# EAGLE board Qwiic_FM_Transceiver_Si4721-Panel (EAGLE 9.5.1), part 1 of 2
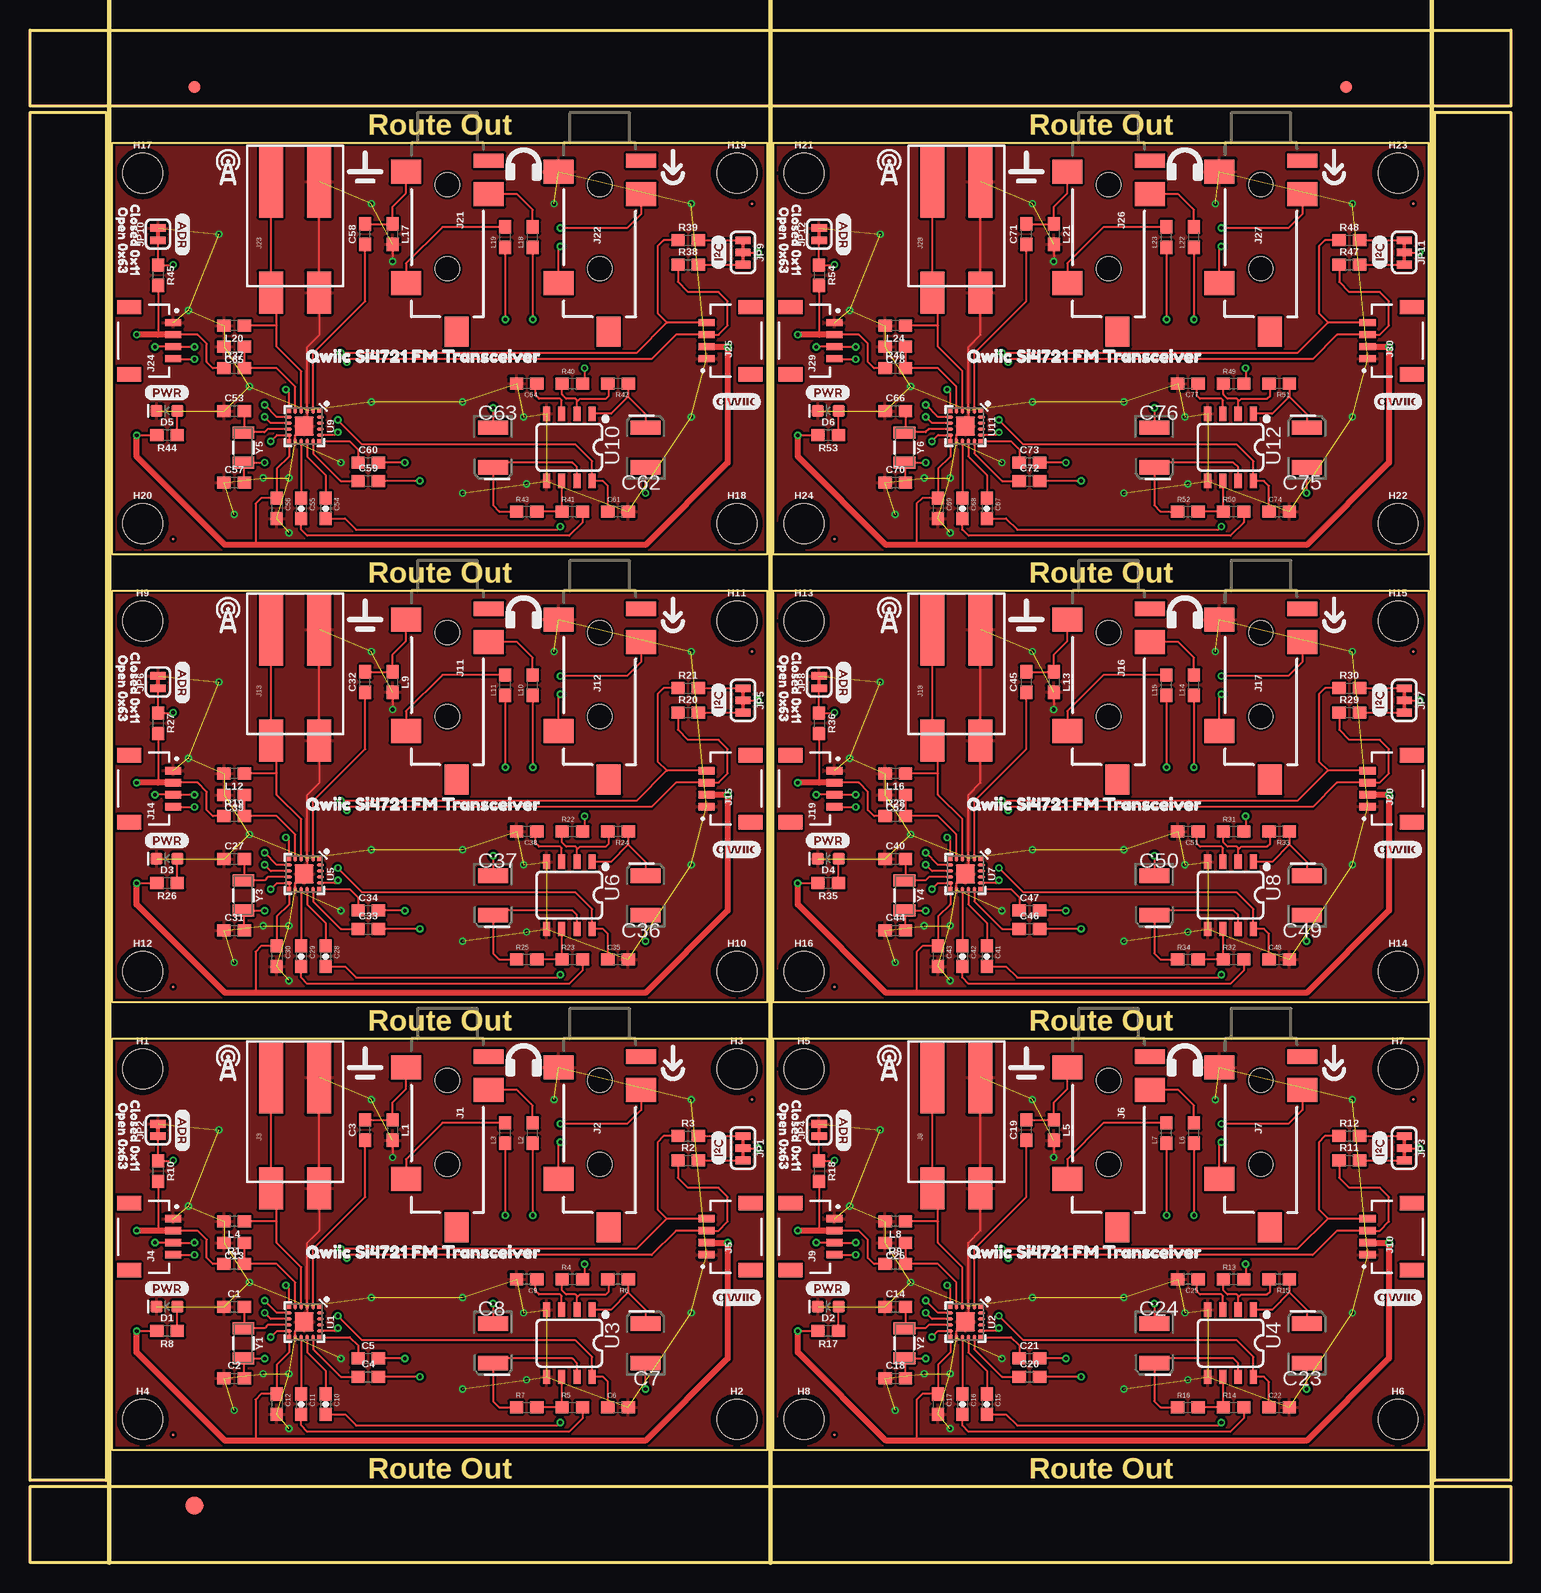
[diagram p0: board, top side]
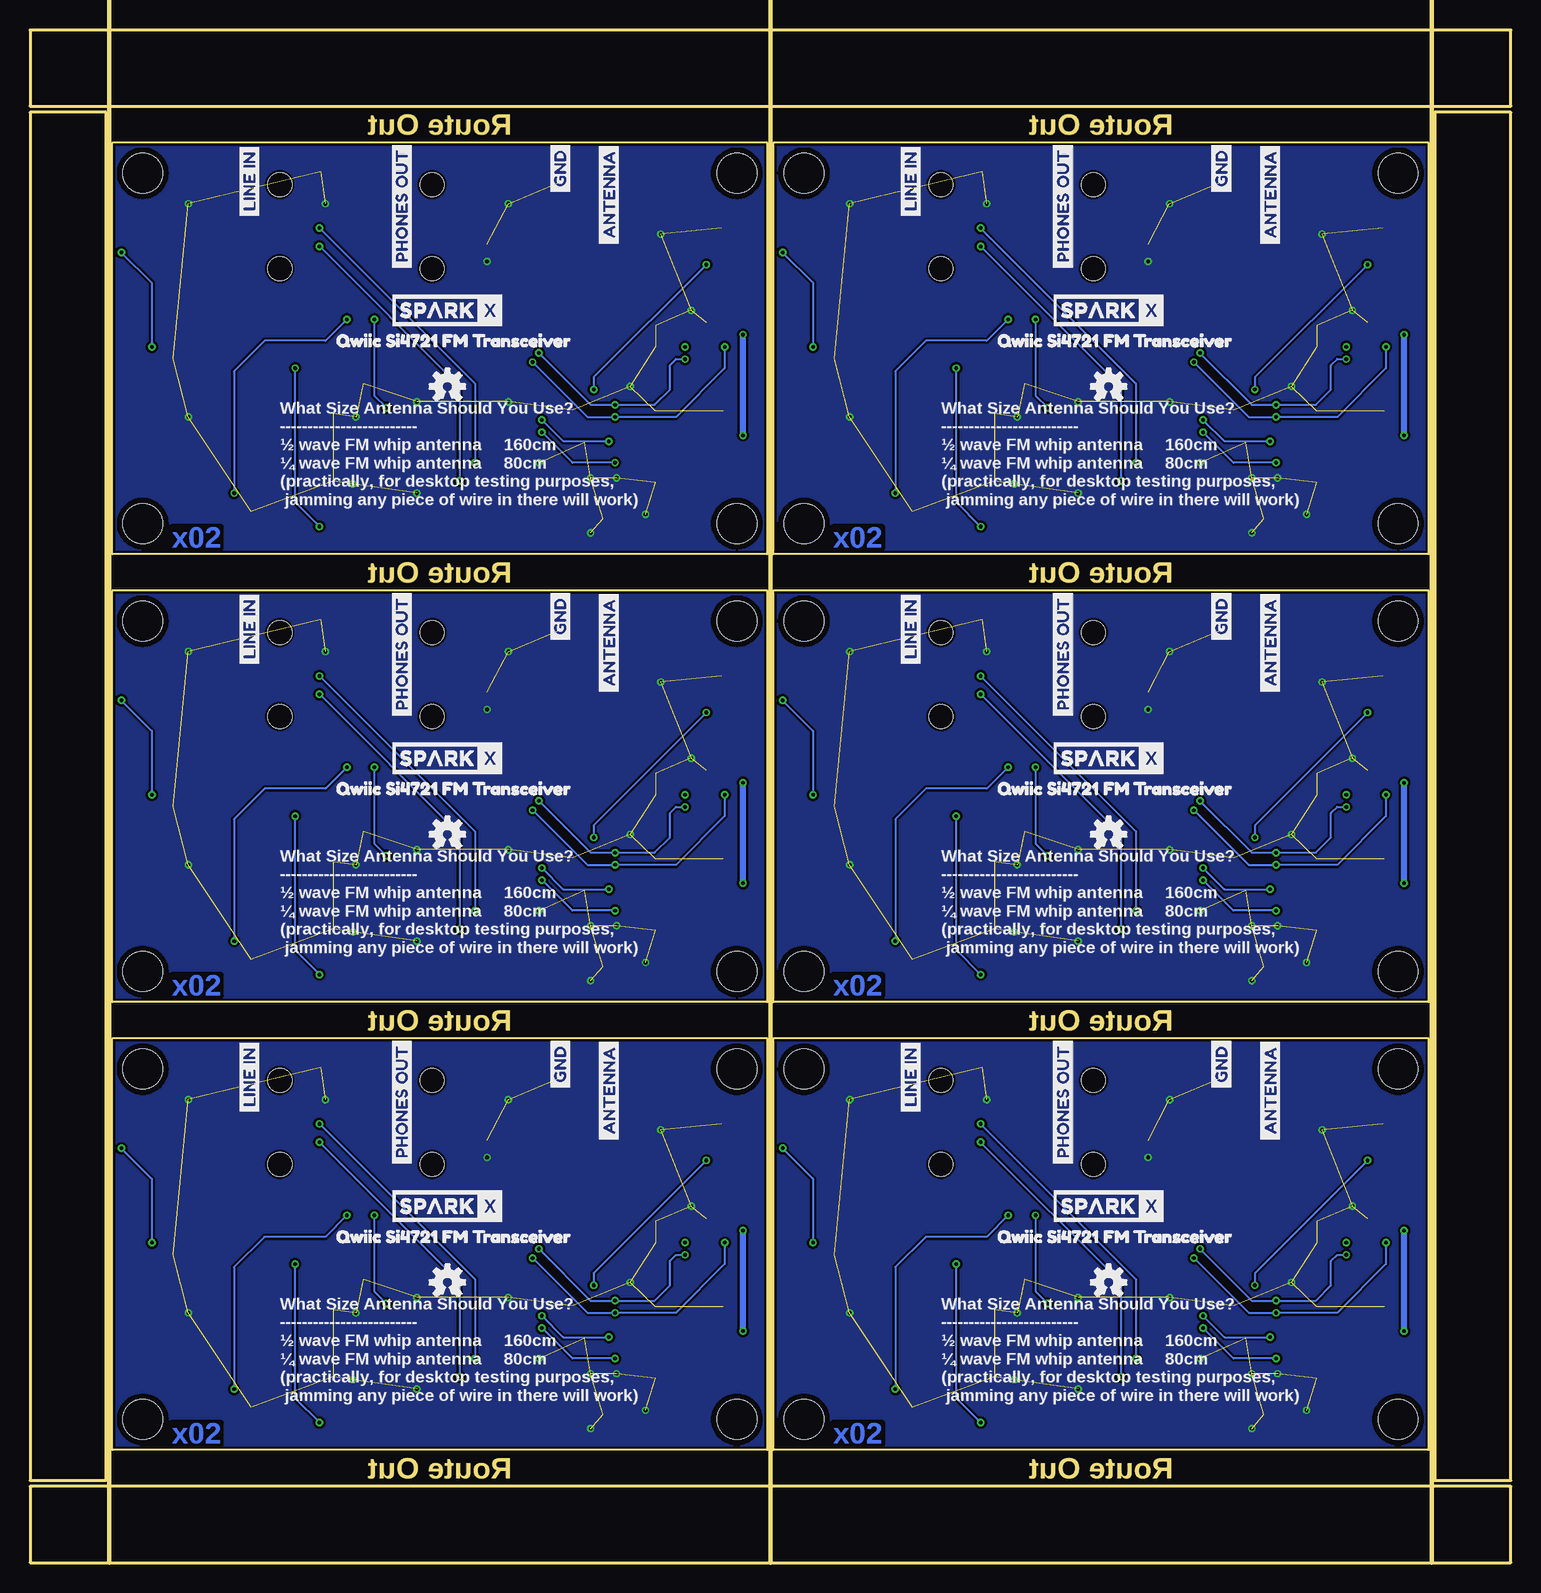
[diagram p1: board, bottom side, seen from below]

Size 123.44 x 127.76 mm. Coordinates in mm from the lower left corner, seen from the top.
Outline: 6.86,9.4 6.86,43.69 61.47,43.69 61.47,9.4 6.86,9.4
Outline: 61.98,9.4 61.98,43.69 116.59,43.69 116.59,9.4 61.98,9.4
Outline: 6.86,46.74 6.86,81.03 61.47,81.03 61.47,46.74 6.86,46.74
Outline: 61.98,46.74 61.98,81.03 116.59,81.03 116.59,46.74 61.98,46.74
Outline: 6.86,84.07 6.86,118.36 61.47,118.36 61.47,84.07 6.86,84.07
Outline: 61.98,84.07 61.98,118.36 116.59,118.36 116.59,84.07 61.98,84.07
Outline: 0,6.35 123.44,6.35 123.44,0 0,0 0,6.35
Outline: 117.09,120.9 123.44,120.9 123.44,6.86 117.09,6.86 117.09,120.9
Outline: 0,127.76 123.44,127.76 123.44,121.41 0,121.41 0,127.76
Outline: 0,120.9 6.35,120.9 6.35,6.86 0,6.86 0,120.9
Copper layers (1*16): Top 0.035mm / dielectric 1.5mm / Bottom 0.035mm
Design rules "SparkFun-2-layer-PCBWay-LIMIT": minimum track width 6mil, minimum drill 0.3mm, track to track 6mil, track to pad 6mil, pad to pad 6mil, via to via 6mil, smd to smd 6mil, copper to edge 6mil, drill to drill 6mil, minimum pad ring 6mil, minimum via ring 6mil, stop-mask expansion 4mil, vias tented up to drill 25mil, thermal gap 10mil
Milling: 3 lines

## Footprints (pad centres in the part's own frame; a part is rotated, then mirrored left to right if it is on the bottom)
0603 = smd 1.1 x 1: 1 -0.85,0; 2 0.85,0
EIA3528 = smd 1.2 x 2.5: A 1.65,0; C -1.65,0
0603-CAP = smd 1.1 x 1: 1 -0.85,0; 2 0.85,0
LED-0603 = smd 1 x 1: A -0.877,0; C 0.877,0
FIDUCIAL-1X2 = smd 1 x 1: 1 0,0
FIDUCIAL-1.5X3 = smd 1.5 x 1.5: 1 0,0
FIDUCIAL-0.2MM = smd 0.2 x 0.2: 1 0,0
STAND-OFF = hole 3.302: 0,0
AUDIO-JACK-3.5MM-SMD = smd 2 x 2.5: RING 4.3,3.45; SLEEVE 2.4,-3.45; TIP 11.7,-3.45 | smd 1.2 x 2.5: RSH 1.5,3.45 | smd 2.5 x 2: TSH 15.75,0.75 | hole 2: 3.5,0; 10.5,0
1X02_POKEHOME = smd 3.5 x 2: P1 5.25,2; P2 5.25,-2 | smd 6 x 2: P3 -4,2; P4 -4,-2
JST04_1MM_RA = smd 0.6 x 1.35: 1 -1.5,0; 2 -0.5,0; 3 0.5,0; 4 1.5,0 | smd 1.2 x 2: NC1 2.8,-3.675; NC2 -2.8,-3.675
SMT-JUMPER_3_2-NC_TRACE_SILK = smd 0.635 x 1.27: 1 -1.016,0; 2 0,0; 3 1.016,0
SMT-JUMPER_2_NC_TRACE_SILK = smd 0.635 x 1.27: 1 -0.508,0; 2 0.508,0
QFN-20-3X3MM = smd 0.34 x 0.34: 1 -1.275,1.265; 6 -1.265,-1.265; 11 1.265,-1.265; 16 1.265,1.265 | smd 0.61 x 0.28: 2 -1.335,0.75; 3 -1.335,0.25; 4 -1.335,-0.25; 5 -1.335,-0.75; 12 1.335,-0.75; 13 1.335,-0.25; 14 1.335,0.25; 15 1.335,0.75 | smd 0.28 x 0.61: 7 -0.75,-1.335; 8 -0.25,-1.335; 9 0.25,-1.335; 10 0.75,-1.335; 17 0.75,1.335; 18 0.25,1.335; 19 -0.25,1.335; 20 -0.75,1.335 | smd 1.6 x 1.6: 21 0,0
SO08 = smd 0.6 x 1.2: 1 -1.905,-2.8; 2 -0.635,-2.8; 3 0.635,-2.8; 4 1.905,-2.8; 5 1.905,2.8; 6 0.635,2.8; 7 -0.635,2.8; 8 -1.905,2.8
CRYSTAL-SMD-3.2X1.5MM = smd 1 x 1.8: P$1 -1.25,0; P$2 1.25,0

## Placement (x,y rotation side)
C1  15pF  [0603]  17.02,21.34 0 top
C2  15pF  [0603]  17.02,15.37 0 top
C3  1nF  [0603]  27.94,36.07 90 top
C4  0.47uF  [0603]  28.19,15.49 0 top
C5  0.47uF  [0603]  28.19,17.02 0 top
C6  0.1uF  [0603]  49.02,12.95 0 top
C7  47uF  [EIA3528]  51.31,18.29 90 top
C8  47uF  [EIA3528]  38.61,18.29 270 top
C9  0.1uF  [0603]  41.4,23.62 180 top
C10  1uF  [0603-CAP]  24.64,13.21 270 top
C11  1uF  [0603-CAP]  22.61,13.21 270 top
C12  22nF  [0603]  20.57,13.21 270 top
C13  2.2uF  [0603]  17.02,26.67 180 top
C14  15pF  [0603]  72.14,21.34 0 top
C15  1uF  [0603-CAP]  79.76,13.21 270 top
C16  1uF  [0603-CAP]  77.72,13.21 270 top
C17  22nF  [0603]  75.69,13.21 270 top
C18  15pF  [0603]  72.14,15.37 0 top
C19  1nF  [0603]  83.06,36.07 90 top
C20  0.47uF  [0603]  83.31,15.49 0 top
C21  0.47uF  [0603]  83.31,17.02 0 top
C22  0.1uF  [0603]  104.14,12.95 0 top
C23  47uF  [EIA3528]  106.43,18.29 90 top
C24  47uF  [EIA3528]  93.73,18.29 270 top
C25  0.1uF  [0603]  96.52,23.62 180 top
C26  2.2uF  [0603]  72.14,26.67 180 top
C27  15pF  [0603]  17.02,58.67 0 top
C28  1uF  [0603-CAP]  24.64,50.55 270 top
C29  1uF  [0603-CAP]  22.61,50.55 270 top
C30  22nF  [0603]  20.57,50.55 270 top
C31  15pF  [0603]  17.02,52.7 0 top
C32  1nF  [0603]  27.94,73.41 90 top
C33  0.47uF  [0603]  28.19,52.83 0 top
C34  0.47uF  [0603]  28.19,54.36 0 top
C35  0.1uF  [0603]  49.02,50.29 0 top
C36  47uF  [EIA3528]  51.31,55.63 90 top
C37  47uF  [EIA3528]  38.61,55.63 270 top
C38  0.1uF  [0603]  41.4,60.96 180 top
C39  2.2uF  [0603]  17.02,64.01 180 top
C40  15pF  [0603]  72.14,58.67 0 top
C41  1uF  [0603-CAP]  79.76,50.55 270 top
C42  1uF  [0603-CAP]  77.72,50.55 270 top
C43  22nF  [0603]  75.69,50.55 270 top
C44  15pF  [0603]  72.14,52.7 0 top
C45  1nF  [0603]  83.06,73.41 90 top
C46  0.47uF  [0603]  83.31,52.83 0 top
C47  0.47uF  [0603]  83.31,54.36 0 top
C48  0.1uF  [0603]  104.14,50.29 0 top
C49  47uF  [EIA3528]  106.43,55.63 90 top
C50  47uF  [EIA3528]  93.73,55.63 270 top
C51  0.1uF  [0603]  96.52,60.96 180 top
C52  2.2uF  [0603]  72.14,64.01 180 top
C53  15pF  [0603]  17.02,96.01 0 top
C54  1uF  [0603-CAP]  24.64,87.88 270 top
C55  1uF  [0603-CAP]  22.61,87.88 270 top
C56  22nF  [0603]  20.57,87.88 270 top
C57  15pF  [0603]  17.02,90.04 0 top
C58  1nF  [0603]  27.94,110.74 90 top
C59  0.47uF  [0603]  28.19,90.17 0 top
C60  0.47uF  [0603]  28.19,91.69 0 top
C61  0.1uF  [0603]  49.02,87.63 0 top
C62  47uF  [EIA3528]  51.31,92.96 90 top
C63  47uF  [EIA3528]  38.61,92.96 270 top
C64  0.1uF  [0603]  41.4,98.3 180 top
C65  2.2uF  [0603]  17.02,101.35 180 top
C66  15pF  [0603]  72.14,96.01 0 top
C67  1uF  [0603-CAP]  79.76,87.88 270 top
C68  1uF  [0603-CAP]  77.72,87.88 270 top
C69  22nF  [0603]  75.69,87.88 270 top
C70  15pF  [0603]  72.14,90.04 0 top
C71  1nF  [0603]  83.06,110.74 90 top
C72  0.47uF  [0603]  83.31,90.17 0 top
C73  0.47uF  [0603]  83.31,91.69 0 top
C74  0.1uF  [0603]  104.14,87.63 0 top
C75  47uF  [EIA3528]  106.43,92.96 90 top
C76  47uF  [EIA3528]  93.73,92.96 270 top
C77  0.1uF  [0603]  96.52,98.3 180 top
C78  2.2uF  [0603]  72.14,101.35 180 top
D1  RED  [LED-0603]  11.43,21.34 180 top
D2  RED  [LED-0603]  66.55,21.34 180 top
D3  RED  [LED-0603]  11.43,58.67 180 top
D4  RED  [LED-0603]  66.55,58.67 180 top
D5  RED  [LED-0603]  11.43,96.01 180 top
D6  RED  [LED-0603]  66.55,96.01 180 top
E$1  [FIDUCIAL-1X2]  13.72,123 0 top
E$2  [FIDUCIAL-1X2]  109.73,123 0 top
E$3  [FIDUCIAL-1.5X3]  13.72,4.76 0 top
FD1  FIDUCIAL0.2MM  [FIDUCIAL-0.2MM]  60.2,38.61 0 top
FD2  FIDUCIAL0.2MM  [FIDUCIAL-0.2MM]  11.94,10.67 0 top
FD3  FIDUCIAL0.2MM  [FIDUCIAL-0.2MM]  115.32,38.61 0 top
FD4  FIDUCIAL0.2MM  [FIDUCIAL-0.2MM]  67.06,10.67 0 top
FD5  FIDUCIAL0.2MM  [FIDUCIAL-0.2MM]  60.2,75.95 0 top
FD6  FIDUCIAL0.2MM  [FIDUCIAL-0.2MM]  11.94,48.01 0 top
FD7  FIDUCIAL0.2MM  [FIDUCIAL-0.2MM]  115.32,75.95 0 top
FD8  FIDUCIAL0.2MM  [FIDUCIAL-0.2MM]  67.06,48.01 0 top
FD9  FIDUCIAL0.2MM  [FIDUCIAL-0.2MM]  60.2,113.28 0 top
FD10  FIDUCIAL0.2MM  [FIDUCIAL-0.2MM]  11.94,85.34 0 top
FD11  FIDUCIAL0.2MM  [FIDUCIAL-0.2MM]  115.32,113.28 0 top
FD12  FIDUCIAL0.2MM  [FIDUCIAL-0.2MM]  67.06,85.34 0 top
H1  STAND-OFF  [STAND-OFF]  9.4,41.15 0 top
H2  STAND-OFF  [STAND-OFF]  58.93,11.94 0 top
H3  STAND-OFF  [STAND-OFF]  58.93,41.15 0 top
H4  STAND-OFF  [STAND-OFF]  9.4,11.94 0 top
H5  STAND-OFF  [STAND-OFF]  64.52,41.15 0 top
H6  STAND-OFF  [STAND-OFF]  114.05,11.94 0 top
H7  STAND-OFF  [STAND-OFF]  114.05,41.15 0 top
H8  STAND-OFF  [STAND-OFF]  64.52,11.94 0 top
H9  STAND-OFF  [STAND-OFF]  9.4,78.49 0 top
H10  STAND-OFF  [STAND-OFF]  58.93,49.28 0 top
H11  STAND-OFF  [STAND-OFF]  58.93,78.49 0 top
H12  STAND-OFF  [STAND-OFF]  9.4,49.28 0 top
H13  STAND-OFF  [STAND-OFF]  64.52,78.49 0 top
H14  STAND-OFF  [STAND-OFF]  114.05,49.28 0 top
H15  STAND-OFF  [STAND-OFF]  114.05,78.49 0 top
H16  STAND-OFF  [STAND-OFF]  64.52,49.28 0 top
H17  STAND-OFF  [STAND-OFF]  9.4,115.82 0 top
H18  STAND-OFF  [STAND-OFF]  58.93,86.61 0 top
H19  STAND-OFF  [STAND-OFF]  58.93,115.82 0 top
H20  STAND-OFF  [STAND-OFF]  9.4,86.61 0 top
H21  STAND-OFF  [STAND-OFF]  64.52,115.82 0 top
H22  STAND-OFF  [STAND-OFF]  114.05,86.61 0 top
H23  STAND-OFF  [STAND-OFF]  114.05,115.82 0 top
H24  STAND-OFF  [STAND-OFF]  64.52,86.61 0 top
J1  AUDIO_JACK_3.5MM_SMD  [AUDIO-JACK-3.5MM-SMD]  34.8,43.69 270 top
J2  AUDIO_JACK_3.5MM_SMD  [AUDIO-JACK-3.5MM-SMD]  47.5,43.69 270 top
J3  [1X02_POKEHOME]  22.1,36.45 270 top
J4  QWIIC_RIGHT_ANGLE  [JST04_1MM_RA]  11.94,27.18 270 top
J5  QWIIC_RIGHT_ANGLE  [JST04_1MM_RA]  56.39,27.18 90 top
J6  AUDIO_JACK_3.5MM_SMD  [AUDIO-JACK-3.5MM-SMD]  89.92,43.69 270 top
J7  AUDIO_JACK_3.5MM_SMD  [AUDIO-JACK-3.5MM-SMD]  102.62,43.69 270 top
J8  [1X02_POKEHOME]  77.22,36.45 270 top
J9  QWIIC_RIGHT_ANGLE  [JST04_1MM_RA]  67.06,27.18 270 top
J10  QWIIC_RIGHT_ANGLE  [JST04_1MM_RA]  111.51,27.18 90 top
J11  AUDIO_JACK_3.5MM_SMD  [AUDIO-JACK-3.5MM-SMD]  34.8,81.03 270 top
J12  AUDIO_JACK_3.5MM_SMD  [AUDIO-JACK-3.5MM-SMD]  47.5,81.03 270 top
J13  [1X02_POKEHOME]  22.1,73.79 270 top
J14  QWIIC_RIGHT_ANGLE  [JST04_1MM_RA]  11.94,64.52 270 top
J15  QWIIC_RIGHT_ANGLE  [JST04_1MM_RA]  56.39,64.52 90 top
J16  AUDIO_JACK_3.5MM_SMD  [AUDIO-JACK-3.5MM-SMD]  89.92,81.03 270 top
J17  AUDIO_JACK_3.5MM_SMD  [AUDIO-JACK-3.5MM-SMD]  102.62,81.03 270 top
J18  [1X02_POKEHOME]  77.22,73.79 270 top
J19  QWIIC_RIGHT_ANGLE  [JST04_1MM_RA]  67.06,64.52 270 top
J20  QWIIC_RIGHT_ANGLE  [JST04_1MM_RA]  111.51,64.52 90 top
J21  AUDIO_JACK_3.5MM_SMD  [AUDIO-JACK-3.5MM-SMD]  34.8,118.36 270 top
J22  AUDIO_JACK_3.5MM_SMD  [AUDIO-JACK-3.5MM-SMD]  47.5,118.36 270 top
J23  [1X02_POKEHOME]  22.1,111.12 270 top
J24  QWIIC_RIGHT_ANGLE  [JST04_1MM_RA]  11.94,101.85 270 top
J25  QWIIC_RIGHT_ANGLE  [JST04_1MM_RA]  56.39,101.85 90 top
J26  AUDIO_JACK_3.5MM_SMD  [AUDIO-JACK-3.5MM-SMD]  89.92,118.36 270 top
J27  AUDIO_JACK_3.5MM_SMD  [AUDIO-JACK-3.5MM-SMD]  102.62,118.36 270 top
J28  [1X02_POKEHOME]  77.22,111.12 270 top
J29  QWIIC_RIGHT_ANGLE  [JST04_1MM_RA]  67.06,101.85 270 top
J30  QWIIC_RIGHT_ANGLE  [JST04_1MM_RA]  111.51,101.85 90 top
JP1  JUMPER-SMT_3_2-NC_TRACE_SILK  [SMT-JUMPER_3_2-NC_TRACE_SILK]  59.44,34.54 270 top
JP2  [SMT-JUMPER_2_NC_TRACE_SILK]  10.67,36.07 90 top
JP3  JUMPER-SMT_3_2-NC_TRACE_SILK  [SMT-JUMPER_3_2-NC_TRACE_SILK]  114.55,34.54 270 top
JP4  [SMT-JUMPER_2_NC_TRACE_SILK]  65.79,36.07 90 top
JP5  JUMPER-SMT_3_2-NC_TRACE_SILK  [SMT-JUMPER_3_2-NC_TRACE_SILK]  59.44,71.88 270 top
JP6  [SMT-JUMPER_2_NC_TRACE_SILK]  10.67,73.41 90 top
JP7  JUMPER-SMT_3_2-NC_TRACE_SILK  [SMT-JUMPER_3_2-NC_TRACE_SILK]  114.55,71.88 270 top
JP8  [SMT-JUMPER_2_NC_TRACE_SILK]  65.79,73.41 90 top
JP9  JUMPER-SMT_3_2-NC_TRACE_SILK  [SMT-JUMPER_3_2-NC_TRACE_SILK]  59.44,109.22 270 top
JP10  [SMT-JUMPER_2_NC_TRACE_SILK]  10.67,110.74 90 top
JP11  JUMPER-SMT_3_2-NC_TRACE_SILK  [SMT-JUMPER_3_2-NC_TRACE_SILK]  114.55,109.22 270 top
JP12  [SMT-JUMPER_2_NC_TRACE_SILK]  65.79,110.74 90 top
L1  270nH  [0603]  30.23,36.07 270 top
L2  FERITE 2.5k  [0603]  41.91,35.81 90 top
L3  FERITE 2.5K  [0603]  39.62,35.81 90 top
L4  120nH  [0603]  17.02,28.45 180 top
L5  270nH  [0603]  85.34,36.07 270 top
L6  FERITE 2.5k  [0603]  97.03,35.81 90 top
L7  FERITE 2.5K  [0603]  94.74,35.81 90 top
L8  120nH  [0603]  72.14,28.45 180 top
L9  270nH  [0603]  30.23,73.41 270 top
L10  FERITE 2.5k  [0603]  41.91,73.15 90 top
L11  FERITE 2.5K  [0603]  39.62,73.15 90 top
L12  120nH  [0603]  17.02,65.79 180 top
L13  270nH  [0603]  85.34,73.41 270 top
L14  FERITE 2.5k  [0603]  97.03,73.15 90 top
L15  FERITE 2.5K  [0603]  94.74,73.15 90 top
L16  120nH  [0603]  72.14,65.79 180 top
L17  270nH  [0603]  30.23,110.74 270 top
L18  FERITE 2.5k  [0603]  41.91,110.49 90 top
L19  FERITE 2.5K  [0603]  39.62,110.49 90 top
L20  120nH  [0603]  17.02,103.12 180 top
L21  270nH  [0603]  85.34,110.74 270 top
L22  FERITE 2.5k  [0603]  97.03,110.49 90 top
L23  FERITE 2.5K  [0603]  94.74,110.49 90 top
L24  120nH  [0603]  72.14,103.12 180 top
R1  10k  [0603]  17.02,24.89 0 top
R2  2.2k  [0603]  54.86,33.53 0 top
R3  2.2k  [0603]  54.86,35.56 0 top
R4  20k  [0603]  45.21,23.62 0 top
R5  20k  [0603]  45.21,12.95 0 top
R6  20k  [0603]  49.02,23.62 180 top
R7  20k  [0603]  41.4,12.95 0 top
R8  1k  [0603]  11.43,19.3 180 top
R9  10k  [0603]  72.14,24.89 0 top
R10  100k  [0603]  10.67,32.64 270 top
R11  2.2k  [0603]  109.98,33.53 0 top
R12  2.2k  [0603]  109.98,35.56 0 top
R13  20k  [0603]  100.33,23.62 0 top
R14  20k  [0603]  100.33,12.95 0 top
R15  20k  [0603]  104.14,23.62 180 top
R16  20k  [0603]  96.52,12.95 0 top
R17  1k  [0603]  66.55,19.3 180 top
R18  100k  [0603]  65.79,32.64 270 top
R19  10k  [0603]  17.02,62.23 0 top
R20  2.2k  [0603]  54.86,70.87 0 top
R21  2.2k  [0603]  54.86,72.9 0 top
R22  20k  [0603]  45.21,60.96 0 top
R23  20k  [0603]  45.21,50.29 0 top
R24  20k  [0603]  49.02,60.96 180 top
R25  20k  [0603]  41.4,50.29 0 top
R26  1k  [0603]  11.43,56.64 180 top
R27  100k  [0603]  10.67,69.98 270 top
R28  10k  [0603]  72.14,62.23 0 top
R29  2.2k  [0603]  109.98,70.87 0 top
R30  2.2k  [0603]  109.98,72.9 0 top
R31  20k  [0603]  100.33,60.96 0 top
R32  20k  [0603]  100.33,50.29 0 top
R33  20k  [0603]  104.14,60.96 180 top
R34  20k  [0603]  96.52,50.29 0 top
R35  1k  [0603]  66.55,56.64 180 top
R36  100k  [0603]  65.79,69.98 270 top
R37  10k  [0603]  17.02,99.57 0 top
R38  2.2k  [0603]  54.86,108.2 0 top
R39  2.2k  [0603]  54.86,110.24 0 top
R40  20k  [0603]  45.21,98.3 0 top
R41  20k  [0603]  45.21,87.63 0 top
R42  20k  [0603]  49.02,98.3 180 top
R43  20k  [0603]  41.4,87.63 0 top
R44  1k  [0603]  11.43,93.98 180 top
R45  100k  [0603]  10.67,107.31 270 top
R46  10k  [0603]  72.14,99.57 0 top
R47  2.2k  [0603]  109.98,108.2 0 top
R48  2.2k  [0603]  109.98,110.24 0 top
R49  20k  [0603]  100.33,98.3 0 top
R50  20k  [0603]  100.33,87.63 0 top
R51  20k  [0603]  104.14,98.3 180 top
R52  20k  [0603]  96.52,87.63 0 top
R53  1k  [0603]  66.55,93.98 180 top
R54  100k  [0603]  65.79,107.31 270 top
U1  SI4721  [QFN-20-3X3MM]  22.86,20.07 270 top
U2  SI4721  [QFN-20-3X3MM]  77.98,20.07 270 top
U3  TPA6111A2DR  [SO08]  44.96,18.29 180 top
U4  TPA6111A2DR  [SO08]  100.08,18.29 180 top
U5  SI4721  [QFN-20-3X3MM]  22.86,57.4 270 top
U6  TPA6111A2DR  [SO08]  44.96,55.63 180 top
U7  SI4721  [QFN-20-3X3MM]  77.98,57.4 270 top
U8  TPA6111A2DR  [SO08]  100.08,55.63 180 top
U9  SI4721  [QFN-20-3X3MM]  22.86,94.74 270 top
U10  TPA6111A2DR  [SO08]  44.96,92.96 180 top
U11  SI4721  [QFN-20-3X3MM]  77.98,94.74 270 top
U12  TPA6111A2DR  [SO08]  100.08,92.96 180 top
U$1  [QWIIC_SI4721_FM_TRANSCEIVER0]  22.1,25.91 0 top
U$2  [QWIIC_SI4721_FM_TRANSCEIVER0]  43.69,27.18 0 bottom
U$3  [QWIIC_4MM]  58.93,22.1 0 top
U$4  [ANTENNA1]  20.07,34.8 90 bottom
U$5  [PWR-()-03]  9.52,22.86 0 top
U$6  [OSHW-LOGO-S]  33.53,23.37 0 bottom
U$7  [GND0]  24.13,39.12 90 bottom
U$8  [LINE_IN2]  50.04,37.08 90 bottom
U$9  [PHONES_OUT3]  37.34,32.77 90 bottom
U$10  [PHONES#PNG]  41.15,41.91 0 top
U$11  [IN#PNG]  53.59,41.66 0 top
U$12  [GND#PNG]  27.94,41.66 0 top
U$13  [ANTENNA#PNG]  16.51,41.66 0 top
U$14  [I_SUPER2_C-()-03]  57.4,33.15 90 top
U$15  [CLOSED_0X110]  8.76,39.24 270 top
U$16  [ADR-()-03]  12.7,37.85 270 top
U$17  [OPEN_0X631]  7.75,38.99 270 top
U$18  SPARKX-LOGO4  [SPARKX-MEDIUM]  33.53,29.72 0 bottom
U$19  [QWIIC_SI4721_FM_TRANSCEIVER0]  98.81,27.18 0 bottom
U$20  [QWIIC_4MM]  114.05,22.1 0 top
U$21  [OSHW-LOGO-S]  88.65,23.37 0 bottom
U$22  [ANTENNA1]  75.18,34.8 90 bottom
U$23  [GND0]  79.25,39.12 90 bottom
U$24  [LINE_IN2]  105.16,37.08 90 bottom
U$25  [PHONES_OUT3]  92.46,32.77 90 bottom
U$26  [PHONES#PNG]  96.27,41.91 0 top
U$27  [IN#PNG]  108.71,41.66 0 top
U$28  [GND#PNG]  83.06,41.66 0 top
U$29  [ANTENNA#PNG]  71.63,41.66 0 top
U$30  SPARKX-LOGO4  [SPARKX-MEDIUM]  88.65,29.72 0 bottom
U$31  [QWIIC_SI4721_FM_TRANSCEIVER0]  77.22,25.91 0 top
U$32  [PWR-()-03]  64.64,22.86 0 top
U$33  [I_SUPER2_C-()-03]  112.52,33.15 90 top
U$34  [ADR-()-03]  67.82,37.85 270 top
U$35  [CLOSED_0X110]  63.88,39.24 270 top
U$36  [OPEN_0X631]  62.86,38.99 270 top
U$37  [QWIIC_SI4721_FM_TRANSCEIVER0]  43.69,64.52 0 bottom
U$38  [QWIIC_4MM]  58.93,59.44 0 top
U$39  [OSHW-LOGO-S]  33.53,60.71 0 bottom
U$40  [ANTENNA1]  20.07,72.14 90 bottom
U$41  [GND0]  24.13,76.45 90 bottom
U$42  [LINE_IN2]  50.04,74.42 90 bottom
U$43  [PHONES_OUT3]  37.34,70.1 90 bottom
U$44  [PHONES#PNG]  41.15,79.25 0 top
U$45  [IN#PNG]  53.59,78.99 0 top
U$46  [GND#PNG]  27.94,78.99 0 top
U$47  [ANTENNA#PNG]  16.51,78.99 0 top
U$48  SPARKX-LOGO4  [SPARKX-MEDIUM]  33.53,67.06 0 bottom
U$49  [QWIIC_SI4721_FM_TRANSCEIVER0]  22.1,63.25 0 top
U$50  [PWR-()-03]  9.52,60.2 0 top
U$51  [I_SUPER2_C-()-03]  57.4,70.48 90 top
U$52  [ADR-()-03]  12.7,75.18 270 top
U$53  [CLOSED_0X110]  8.76,76.58 270 top
U$54  [OPEN_0X631]  7.75,76.33 270 top
U$55  [QWIIC_SI4721_FM_TRANSCEIVER0]  98.81,64.52 0 bottom
U$56  [QWIIC_4MM]  114.05,59.44 0 top
U$57  [OSHW-LOGO-S]  88.65,60.71 0 bottom
U$58  [ANTENNA1]  75.18,72.14 90 bottom
U$59  [GND0]  79.25,76.45 90 bottom
U$60  [LINE_IN2]  105.16,74.42 90 bottom
U$61  [PHONES_OUT3]  92.46,70.1 90 bottom
U$62  [PHONES#PNG]  96.27,79.25 0 top
U$63  [IN#PNG]  108.71,78.99 0 top
U$64  [GND#PNG]  83.06,78.99 0 top
U$65  [ANTENNA#PNG]  71.63,78.99 0 top
U$66  SPARKX-LOGO4  [SPARKX-MEDIUM]  88.65,67.06 0 bottom
U$67  [QWIIC_SI4721_FM_TRANSCEIVER0]  77.22,63.25 0 top
U$68  [PWR-()-03]  64.64,60.2 0 top
U$69  [I_SUPER2_C-()-03]  112.52,70.48 90 top
U$70  [ADR-()-03]  67.82,75.18 270 top
U$71  [CLOSED_0X110]  63.88,76.58 270 top
U$72  [OPEN_0X631]  62.86,76.33 270 top
U$73  [QWIIC_SI4721_FM_TRANSCEIVER0]  43.69,101.85 0 bottom
U$74  [QWIIC_4MM]  58.93,96.77 0 top
U$75  [OSHW-LOGO-S]  33.53,98.04 0 bottom
U$76  [ANTENNA1]  20.07,109.47 90 bottom
U$77  [GND0]  24.13,113.79 90 bottom
U$78  [LINE_IN2]  50.04,111.76 90 bottom
U$79  [PHONES_OUT3]  37.34,107.44 90 bottom
U$80  [PHONES#PNG]  41.15,116.59 0 top
U$81  [IN#PNG]  53.59,116.33 0 top
U$82  [GND#PNG]  27.94,116.33 0 top
U$83  [ANTENNA#PNG]  16.51,116.33 0 top
U$84  SPARKX-LOGO4  [SPARKX-MEDIUM]  33.53,104.39 0 bottom
U$85  [QWIIC_SI4721_FM_TRANSCEIVER0]  22.1,100.58 0 top
U$86  [PWR-()-03]  9.52,97.54 0 top
U$87  [I_SUPER2_C-()-03]  57.4,107.82 90 top
U$88  [ADR-()-03]  12.7,112.52 270 top
U$89  [CLOSED_0X110]  8.76,113.92 270 top
U$90  [OPEN_0X631]  7.75,113.66 270 top
U$91  [QWIIC_SI4721_FM_TRANSCEIVER0]  98.81,101.85 0 bottom
U$92  [QWIIC_4MM]  114.05,96.77 0 top
U$93  [OSHW-LOGO-S]  88.65,98.04 0 bottom
U$94  [ANTENNA1]  75.18,109.47 90 bottom
U$95  [GND0]  79.25,113.79 90 bottom
U$96  [LINE_IN2]  105.16,111.76 90 bottom
U$97  [PHONES_OUT3]  92.46,107.44 90 bottom
U$98  [PHONES#PNG]  96.27,116.59 0 top
U$99  [IN#PNG]  108.71,116.33 0 top
U$100  [GND#PNG]  83.06,116.33 0 top
U$101  [ANTENNA#PNG]  71.63,116.33 0 top
U$102  SPARKX-LOGO4  [SPARKX-MEDIUM]  88.65,104.39 0 bottom
U$103  [QWIIC_SI4721_FM_TRANSCEIVER0]  77.22,100.58 0 top
U$104  [PWR-()-03]  64.64,97.54 0 top
U$105  [I_SUPER2_C-()-03]  112.52,107.82 90 top
U$106  [ADR-()-03]  67.82,112.52 270 top
U$107  [CLOSED_0X110]  63.88,113.92 270 top
U$108  [OPEN_0X631]  62.86,113.66 270 top
Y1  32.768kHz  [CRYSTAL-SMD-3.2X1.5MM]  17.78,18.29 270 top
Y2  32.768kHz  [CRYSTAL-SMD-3.2X1.5MM]  72.9,18.29 270 top
Y3  32.768kHz  [CRYSTAL-SMD-3.2X1.5MM]  17.78,55.63 270 top
Y4  32.768kHz  [CRYSTAL-SMD-3.2X1.5MM]  72.9,55.63 270 top
Y5  32.768kHz  [CRYSTAL-SMD-3.2X1.5MM]  17.78,92.96 270 top
Y6  32.768kHz  [CRYSTAL-SMD-3.2X1.5MM]  72.9,92.96 270 top

## Library data of the parts
C1 C2 C14 C18 C27 C31 C40 C44 C53 C57 C66 C70 = SparkFun-Capacitors; PROD_ID: CAP-07881
C3 C19 C32 C45 C58 C71 = SparkFun-Capacitors; PROD_ID: CAP-07886
C4 C5 C20 C21 C33 C34 C46 C47 C59 C60 C72 C73 = SparkFun-Capacitors
C6 C9 C22 C25 C35 C38 C48 C51 C61 C64 C74 C77 = SparkFun-Capacitors; PROD_ID: CAP-00810
C7 C8 C23 C24 C36 C37 C49 C50 C62 C63 C75 C76 = SparkFun-Capacitors; PROD_ID: CAP-08310
C10 C11 C15 C16 C28 C29 C41 C42 C54 C55 C67 C68 = SparkFun-Capacitors; PROD_ID: CAP-00868
C12 C17 C30 C43 C56 C69 = SparkFun-Capacitors; PROD_ID: CAP-07885
C13 C26 C39 C52 C65 C78 = SparkFun-Capacitors; PROD_ID: CAP-07888
D1-D6 = SparkFun-LED; PROD_ID: DIO-00819
E$1 E$2 FD1-FD12 U$3 U$6 U$20 U$21 U$38 U$39 U$56 U$57 U$74 U$75 U$92 U$93 = SparkFun-Aesthetics
E$3 = SparkFun-Retired
H1-H24 = SparkFun-Hardware
J1 J2 J6 J7 J11 J12 J16 J17 J21 J22 J26 J27 = SparkFun-Connectors; PROD_ID: CONN-10353
J3 J8 J13 J18 J23 J28 = SparkFun-Connectors; PROD_ID: CONN-13512
J4 J5 J9 J10 J14 J15 J19 J20 J24 J25 J29 J30 = SparkFun-Connectors; PROD_ID: CONN-13694
JP1-JP12 = SparkFun-Jumpers
L1 L4 L5 L8 L9 L12 L13 L16 L17 L20 L21 L24 = SparkFun-Coils; PROD_ID: NDUC-11660
L2 L3 L6 L7 L10 L11 L14 L15 L18 L19 L22 L23 = SparkFun-Coils; PROD_ID: NDUC-13805; VALUE: 30Ω/1.8A
R1 R9 R19 R28 R37 R46 = SparkFun-Resistors; PROD_ID: RES-00824
R2 R3 R11 R12 R20 R21 R29 R30 R38 R39 R47 R48 = SparkFun-Resistors; PROD_ID: RES-08272
R4-R7 R13-R16 R22-R25 R31-R34 R40-R43 R49-R52 = SparkFun-Resistors; PROD_ID: RES-09231
R8 R17 R26 R35 R44 R53 = SparkFun-Resistors; PROD_ID: RES-07856
R10 R18 R27 R36 R45 R54 = SparkFun-Resistors; PROD_ID: RES-07828
U1 U2 U5 U7 U9 U11 = SparkFun-RF
U3 U4 U6 U8 U10 U12 = SparkFun-IC-Amplifiers; PROD_ID: IC-10149
U$1 U$2 U$19 U$31 U$37 U$49 U$55 U$67 U$73 U$85 U$91 U$103 = si4721label
U$4 U$7-U$9 U$22-U$25 U$40-U$43 U$58-U$61 U$76-U$79 U$94-U$97 = si4721connlabels
U$5 U$14 U$16 U$32-U$34 U$50-U$52 U$68-U$70 U$86-U$88 U$104-U$106 = Labels
U$10 U$26 U$44 U$62 U$80 U$98 = phones#png
U$11 U$27 U$45 U$63 U$81 U$99 = in#png
U$12 U$28 U$46 U$64 U$82 U$100 = gnd#png
U$13 U$29 U$47 U$65 U$83 U$101 = antenna#png
U$15 U$17 U$35 U$36 U$53 U$54 U$71 U$72 U$89 U$90 U$107 U$108 = addr_labels
U$18 U$30 U$48 U$66 U$84 U$102 = SparkX
Y1-Y6 = SparkFun-Clocks; PROD_ID: XTAL-13062

## Nets
3.3V: C6.1 C12.1 J4.2 J5.2 JP1.2 R1.1 R8.2 R10.2 U1.10 U1.11 U3.8
3.3V1: C17.1 C22.1 J9.2 J10.2 JP3.2 R9.1 R17.2 R18.2 U2.10 U2.11 U4.8
3.3V2: C30.1 C35.1 J14.2 J15.2 JP5.2 R19.1 R26.2 R27.2 U5.10 U5.11 U6.8
3.3V3: C43.1 C48.1 J19.2 J20.2 JP7.2 R28.1 R35.2 R36.2 U7.10 U7.11 U8.8
3.3V4: C56.1 C61.1 J24.2 J25.2 JP9.2 R37.1 R44.2 R45.2 U9.10 U9.11 U10.8
3.3V5: C69.1 C74.1 J29.2 J30.2 JP11.2 R46.1 R53.2 R54.2 U11.10 U11.11 U12.8
ADDR: JP2.1 R10.1 U1.6
ADDR1: JP4.1 R18.1 U2.6
ADDR2: JP6.1 R27.1 U5.6
ADDR3: JP8.1 R36.1 U7.6
ADDR4: JP10.1 R45.1 U9.6
ADDR5: JP12.1 R54.1 U11.6
FMI: C3.1 U1.2
FMI1: C19.1 U2.2
FMI2: C32.1 U5.2
FMI3: C45.1 U7.2
FMI4: C58.1 U9.2
FMI5: C71.1 U11.2
GND: C1.1 C2.1 C6.2 C9.2 C12.2 C13.2 D1.C J2.SLEEVE J3.P1 J3.P3 J4.1 J5.1 JP2.2 L1.2 L4.2 U1.3 U1.12 U1.21 U3.4 U3.5
GND1: C14.1 C17.2 C18.1 C22.2 C25.2 C26.2 D2.C J7.SLEEVE J8.P1 J8.P3 J9.1 J10.1 JP4.2 L5.2 L8.2 U2.3 U2.12 U2.21 U4.4 U4.5
GND2: C27.1 C30.2 C31.1 C35.2 C38.2 C39.2 D3.C J12.SLEEVE J13.P1 J13.P3 J14.1 J15.1 JP6.2 L9.2 L12.2 U5.3 U5.12 U5.21 U6.4 U6.5
GND3: C40.1 C43.2 C44.1 C48.2 C51.2 C52.2 D4.C J17.SLEEVE J18.P1 J18.P3 J19.1 J20.1 JP8.2 L13.2 L16.2 U7.3 U7.12 U7.21 U8.4 U8.5
GND4: C53.1 C56.2 C57.1 C61.2 C64.2 C65.2 D5.C J22.SLEEVE J23.P1 J23.P3 J24.1 J25.1 JP10.2 L17.2 L20.2 U9.3 U9.12 U9.21 U10.4 U10.5
GND5: C66.1 C69.2 C70.1 C74.2 C77.2 C78.2 D6.C J27.SLEEVE J28.P1 J28.P3 J29.1 J30.1 JP12.2 L21.2 L24.2 U11.3 U11.12 U11.21 U12.4 U12.5
GPO1: U1.19
GPO2: U1.18
GPO3: U2.19
GPO4: U2.18
GPO5: U5.19
GPO6: U5.18
GPO7: U7.19
GPO8: U7.18
GPO9: U9.19
GPO10: U9.18
GPO11: U11.19
GPO12: U11.18
LIN: C5.1 U1.16
LIN1: C21.1 U2.16
LIN2: C34.1 U5.16
LIN3: C47.1 U7.16
LIN4: C60.1 U9.16
LIN5: C73.1 U11.16
LOUT: C10.1 U1.14
LOUT1: C15.1 U2.14
LOUT2: C28.1 U5.14
LOUT3: C41.1 U7.14
LOUT4: C54.1 U9.14
LOUT5: C67.1 U11.14
N$1: C13.1 R1.2 U1.5
N$2: C1.2 U1.9 Y1.P$1
N$3: J1.RING L2.2
N$4: J1.TIP L3.2
N$5: C3.2 J1.SLEEVE L1.1
N$6: C4.2 J2.TIP
N$7: C7.A R6.1 U3.1
N$8: C2.2 U1.17 Y1.P$2
N$9: C8.A R7.1 U3.7
N$10: C9.1 U3.3
N$11: R4.1 R6.2 U3.2
N$12: R5.1 R7.2 U3.6
N$13: C10.2 R4.2
N$14: C11.2 R5.2
N$15: C7.C L2.1
N$16: C8.C L3.1
N$17: C5.2 J2.RING
N$18: JP1.3 R2.2
N$19: JP1.1 R3.2
N$20: D1.A R8.1
N$21: C14.2 U2.9 Y2.P$1
N$22: C18.2 U2.17 Y2.P$2
N$23: C26.1 R9.2 U2.5
N$24: C19.2 J6.SLEEVE L5.1
N$25: C23.A R15.1 U4.1
N$26: C24.A R16.1 U4.7
N$27: C25.1 U4.3
N$28: R13.1 R15.2 U4.2
N$29: R14.1 R16.2 U4.6
N$30: C15.2 R13.2
N$31: C16.2 R14.2
N$32: C23.C L6.1
N$33: C24.C L7.1
N$34: J6.RING L6.2
N$35: J6.TIP L7.2
N$36: C20.2 J7.TIP
N$37: C21.2 J7.RING
N$38: JP3.3 R11.2
N$39: JP3.1 R12.2
N$40: D2.A R17.1
N$41: C27.2 U5.9 Y3.P$1
N$42: C31.2 U5.17 Y3.P$2
N$43: C39.1 R19.2 U5.5
N$44: C32.2 J11.SLEEVE L9.1
N$45: C36.A R24.1 U6.1
N$46: C37.A R25.1 U6.7
N$47: C38.1 U6.3
N$48: R22.1 R24.2 U6.2
N$49: R23.1 R25.2 U6.6
N$50: C28.2 R22.2
N$51: C29.2 R23.2
N$52: C36.C L10.1
N$53: C37.C L11.1
N$54: J11.RING L10.2
N$55: J11.TIP L11.2
N$56: C33.2 J12.TIP
N$57: C34.2 J12.RING
N$58: JP5.3 R20.2
N$59: JP5.1 R21.2
N$60: D3.A R26.1
N$61: C40.2 U7.9 Y4.P$1
N$62: C44.2 U7.17 Y4.P$2
N$63: C52.1 R28.2 U7.5
N$64: C45.2 J16.SLEEVE L13.1
N$65: C49.A R33.1 U8.1
N$66: C50.A R34.1 U8.7
N$67: C51.1 U8.3
N$68: R31.1 R33.2 U8.2
N$69: R32.1 R34.2 U8.6
N$70: C41.2 R31.2
N$71: C42.2 R32.2
N$72: C49.C L14.1
N$73: C50.C L15.1
N$74: J16.RING L14.2
N$75: J16.TIP L15.2
N$76: C46.2 J17.TIP
N$77: C47.2 J17.RING
N$78: JP7.3 R29.2
N$79: JP7.1 R30.2
N$80: D4.A R35.1
N$81: C53.2 U9.9 Y5.P$1
N$82: C57.2 U9.17 Y5.P$2
N$83: C65.1 R37.2 U9.5
N$84: C58.2 J21.SLEEVE L17.1
N$85: C62.A R42.1 U10.1
N$86: C63.A R43.1 U10.7
N$87: C64.1 U10.3
N$88: R40.1 R42.2 U10.2
N$89: R41.1 R43.2 U10.6
N$90: C54.2 R40.2
N$91: C55.2 R41.2
N$92: C62.C L18.1
N$93: C63.C L19.1
N$94: J21.RING L18.2
N$95: J21.TIP L19.2
N$96: C59.2 J22.TIP
N$97: C60.2 J22.RING
N$98: JP9.3 R38.2
N$99: JP9.1 R39.2
N$100: D5.A R44.1
N$101: C66.2 U11.9 Y6.P$1
N$102: C70.2 U11.17 Y6.P$2
N$103: C78.1 R46.2 U11.5
N$104: C71.2 J26.SLEEVE L21.1
N$105: C75.A R51.1 U12.1
N$106: C76.A R52.1 U12.7
N$107: C77.1 U12.3
N$108: R49.1 R51.2 U12.2
N$109: R50.1 R52.2 U12.6
N$110: C67.2 R49.2
N$111: C68.2 R50.2
N$112: C75.C L22.1
N$113: C76.C L23.1
N$114: J26.RING L22.2
N$115: J26.TIP L23.2
N$116: C72.2 J27.TIP
N$117: C73.2 J27.RING
N$118: JP11.3 R47.2
N$119: JP11.1 R48.2
N$120: D6.A R53.1
RIN: C4.1 U1.15
RIN1: C20.1 U2.15
RIN2: C33.1 U5.15
RIN3: C46.1 U7.15
RIN4: C59.1 U9.15
RIN5: C72.1 U11.15
ROUT: C11.1 U1.13
ROUT1: C16.1 U2.13
ROUT2: C29.1 U5.13
ROUT3: C42.1 U7.13
ROUT4: C55.1 U9.13
ROUT5: C68.1 U11.13
SCLK: J4.4 J5.4 R3.1 U1.7
SCLK1: J9.4 J10.4 R12.1 U2.7
SCLK2: J14.4 J15.4 R21.1 U5.7
SCLK3: J19.4 J20.4 R30.1 U7.7
SCLK4: J24.4 J25.4 R39.1 U9.7
SCLK5: J29.4 J30.4 R48.1 U11.7
SDIO: J4.3 J5.3 R2.1 U1.8
SDIO1: J9.3 J10.3 R11.1 U2.8
SDIO2: J14.3 J15.3 R20.1 U5.8
SDIO3: J19.3 J20.3 R29.1 U7.8
SDIO4: J24.3 J25.3 R38.1 U9.8
SDIO5: J29.3 J30.3 R47.1 U11.8
TXO: J3.P2 J3.P4 L4.1 U1.4
TXO1: J8.P2 J8.P4 L8.1 U2.4
TXO2: J13.P2 J13.P4 L12.1 U5.4
TXO3: J18.P2 J18.P4 L16.1 U7.4
TXO4: J23.P2 J23.P4 L20.1 U9.4
TXO5: J28.P2 J28.P4 L24.1 U11.4